# Altium PCB 263-15.2.PcbDoc
Units mm, origin at the board's own origin, x right, y up, seen from the top; angles counter-clockwise.
Board outline 53.09 x 25.43 mm, 2 copper layers (Top Layer, Bottom Layer); 15 components, 11 nets, 42 pads, 0 vias.
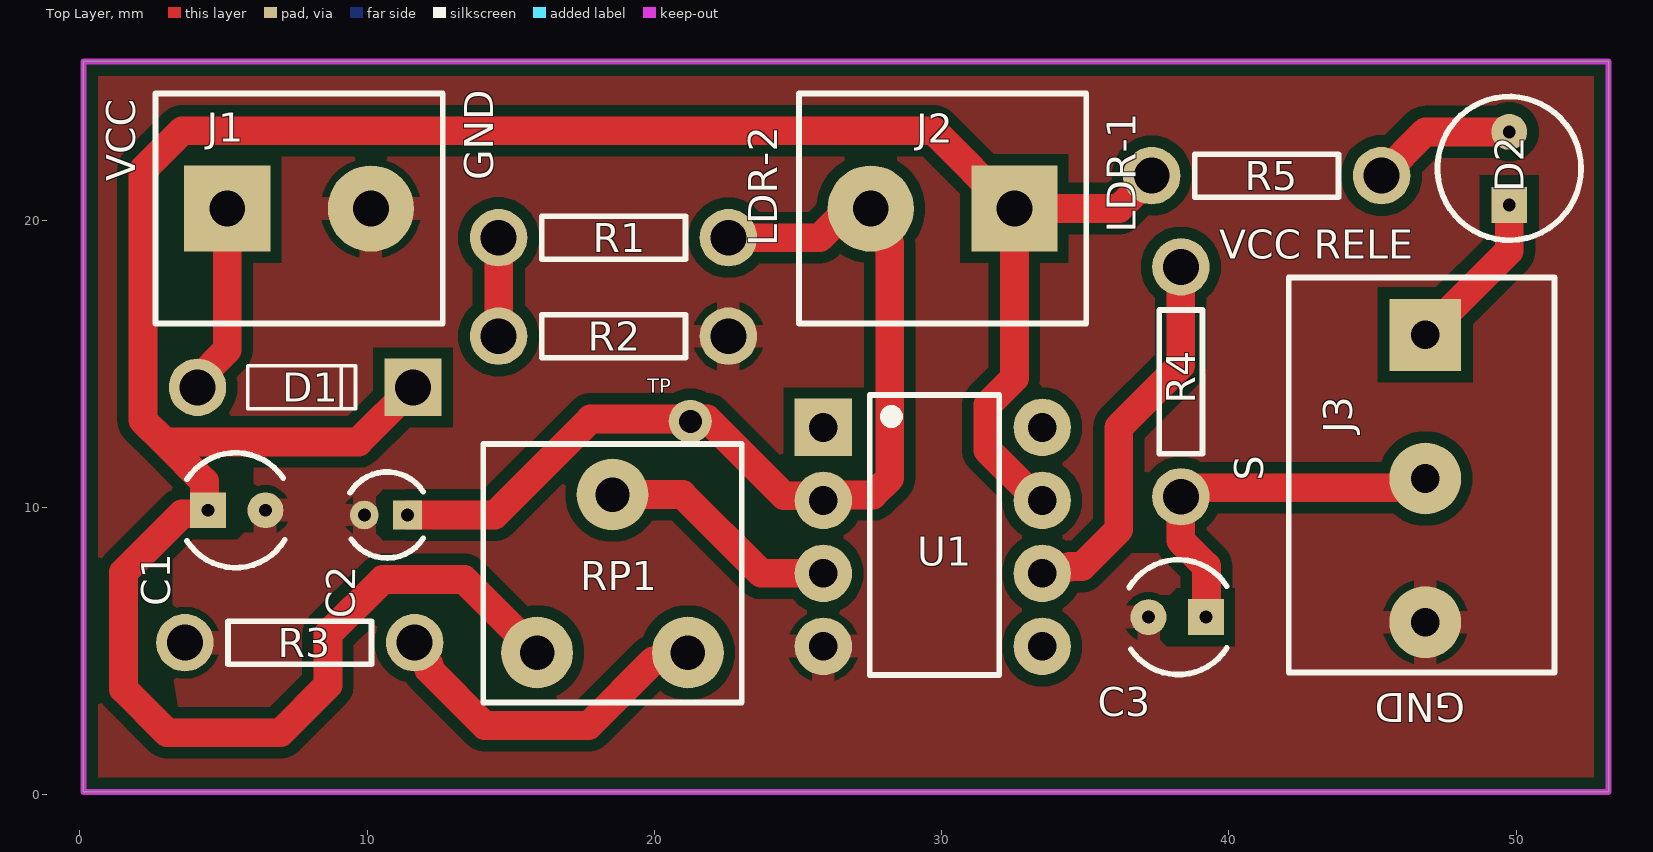
[diagram p0: Top Layer view]
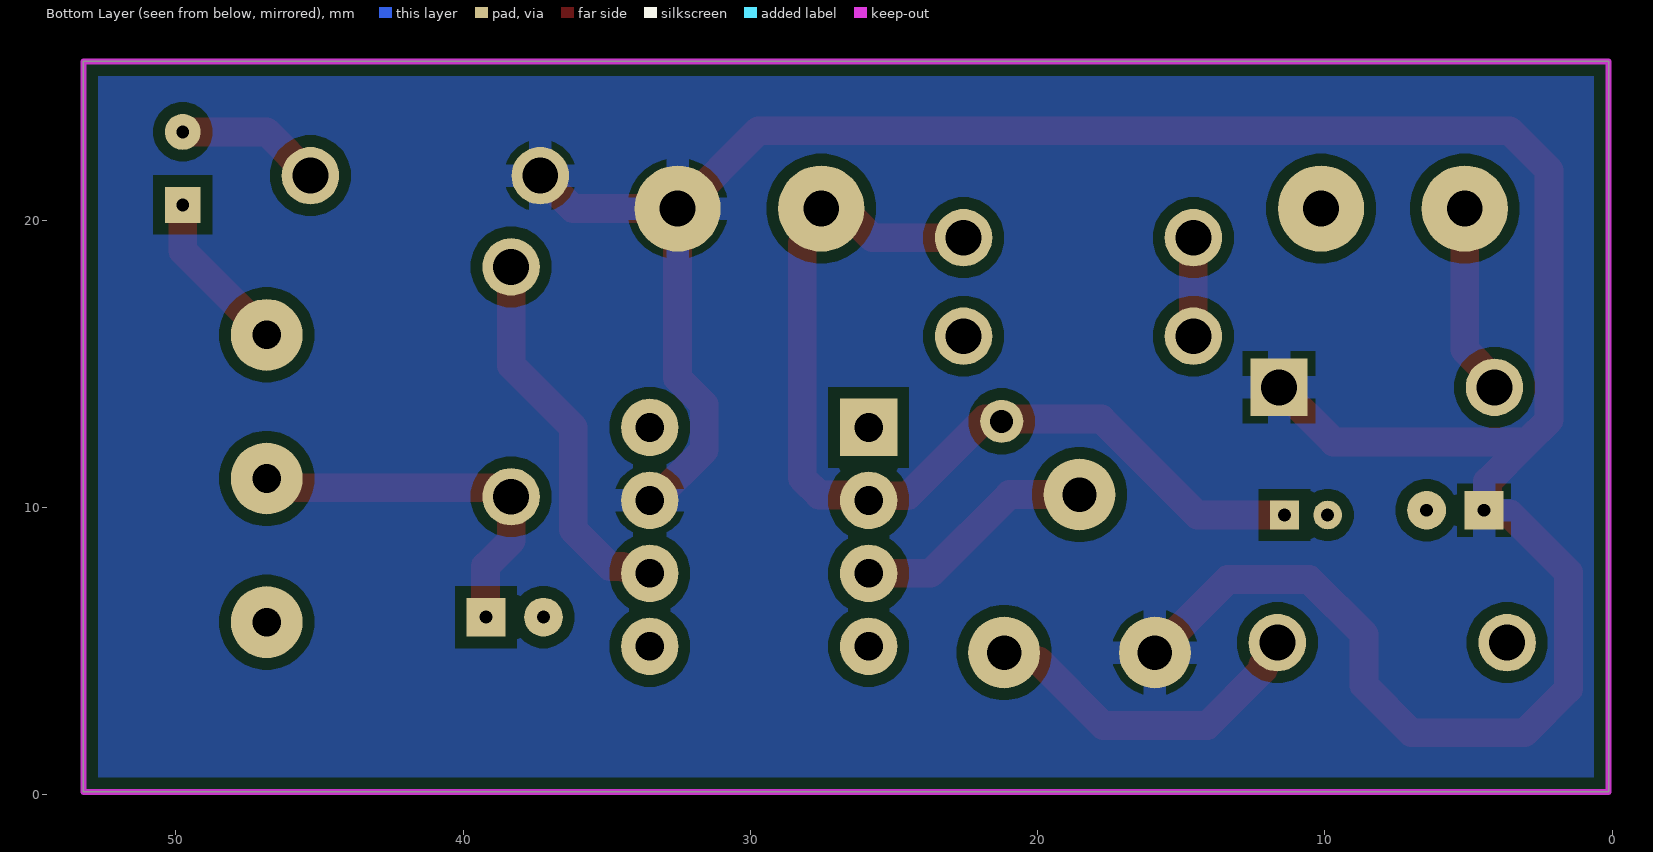
[diagram p1: Bottom Layer view, seen from below]

## Layer stack, top to bottom
Top Solder: solder mask 0.0102, Solder Resist, Dk 3.5
Top Layer: signal copper 0.0356
Dielectric 1: dielectric 0.32, FR-4, Dk 4.8
Bottom Layer: signal copper 0.0356
Bottom Solder: solder mask 0.0102, Solder Resist, Dk 3.5

## Board outline
0.127,0.1 0.127,25.527 53.213,25.527 53.213,0.1

## Design rules (kind name [scope] priority, off if disabled: settings)
AssemblyTestpoint [All] p1: testpointundercomponent=TRUE minsize=1.016 maxsize=2.54 preferedsize=1.524 minholesize=0 maxholesize=1 preferedholesize=0.8 testpointgrid=0.025 usegrid=FALSE gridtolerance=0 allowsidetop=TRUE allowsidebottom=TRUE
Clearance [All] p1: gap=0.4 ignorepadtopadclearanceinfootprint=FALSE
FabricationTestpoint [All] p1: side=3 testpointundercomponent=TRUE minsize=1.016 maxsize=2.54 preferedsize=1.5 minholesize=0 maxholesize=1 preferedholesize=0.8 testpointgrid=0.025 allowsidetop=TRUE allowsidebottom=TRUE usegrid=FALSE gridtolerance=0
PlaneConnect [All] p1: planeconnectstyle=Relief reliefexpansion=0.508 reliefentries=4 reliefconductorwidth=1 reliefairgap=0.254
PolygonConnect [All] p1: connectstyle=Relief reliefconductorwidth=0.8 reliefentries=4 polygonreliefangle="90 Angle" airgapwidth=0.254
RoutingVias [All] p1: holewidth=0.711 width=1.27 viastyle="Through Hole" minholewidth=0.711 minwidth=1.27 maxholewidth=0.711 maxwidth=1.27
SolderMaskExpansion [All] p1: expansion=0.102 istentingtop=FALSE
Width [All] p1: maxlimit=2 minlimit=0.254 preferedwidth=1 toplayer_minwidth=1 minimp=50.000000 maximp=50.000000 favimp=50.000000
27 further rules are at their usual default settings.

## Classes and differential pairs
component class 263-15.2: C2 C3 D1 D2 J1 J2 J3 R1 R2 R3 R4 R5 RP1 U1

## Components (designator, comment, footprint, x,y, rotation, side; value= is the part's Value field where it differs from the comment)
C1 "CAP_100uF_16V" CAP_2mm 5.461,9.906 r0 top value="100 uF"
C2 "CAP_10uF_16V" CAP_1.5mm 10.653,9.74 r180 top value="10 uF"
C3 "CAP_100uF_16V" CAP_2mm 38.2,6.184 r180 top value="100 uF"
D1 "D_1N4007" DO-41 7.847,14.185 r180 top
D2 "DL_MV5754A" LED-2.54mm 49.757,21.805 r90 top
J1 "CON_F_2_MB612-50002" CON_2_5mm 5.133,20.408 r0 top
J2 "CON_F_2_MB612-50002" CON_2_5mm 32.532,20.408 r180 top
J3 "CON_F_3_897-0812" CON_3_5MM 46.836,16.01 r270 top
R1 "R_100K_THC_0.25W" RESISTOR-8mm 14.579,19.392 r0 top value="100k Ω"
R2 "R_47K_THC_0.25W" RESISTOR-8mm 22.579,15.963 r180 top value="47k Ω"
R3 "R_100K_THC_0.25W" RESISTOR-8mm 3.657,5.295 r0 top value="100k Ω"
R4 "R_47K_THC_0.25W" RESISTOR-8mm 38.327,10.375 r90 top value="47k Ω"
R5 "R_330_THC_0.25W" RESISTOR-8mm 45.312,21.551 r180 top value="330 Ω"
RP1 "RP_RKT6V-H" RP_RKT6V 18.542,4.953 r0 top value="500K Ω"
U1 "IC_LM741" PDIP-8_THC 29.691,8.978 r0 top

## Footprints (in the part's own frame and the unit in brackets; to place one, negate y for a bottom-side part, rotate by r counter-clockwise, add the part's x,y. Pads: shape width x height; smd on the part's side, far side on the other; paste and mask are expansions set on the pad)
CAP_1.5mm [mm]
  rect 1x1 hole 0.45: 1(-0.75,0)
  round 1 hole 0.45: 2(0.75,0)
  silkscreen extent -1.3,-1.5 1.25,1.5
CAP_2mm [mm]
  rect 1.25x1.25 / inner rect 1.35x1.35 / far side rect 1.35x1.35 hole 0.45: 1(-1,0)
  round 1.25 / inner round 1.35 / far side round 1.35 hole 0.45: 2(1,0)
  silkscreen extent -1.73,-2 1.67,2
CON_2_5mm [mm]
  round 3 hole 1.25: 1(0,0) 2(5,0)
  rect 3x3 smd: 1(0,0)
  silkscreen extent -2.5,-4 7.5,4, body extent -2.5,-4.1 7.5,4, height 10.4
CON_3_5MM [mm]
  round 2.5 hole 1: 1(0,0) 2(5,0) 3(10,0)
  rect 2.5x2.5 smd: 1(0,0)
  silkscreen extent -2,-4.75 11.75,4.5, body extent -2.62,-5.25 12.38,5.05, height 14
DO-41 [mm]
  round 2 hole 1.25: A(3.75,0)
  rect 2x2 hole 1.25: K(-3.75,0)
  silkscreen extent -1.75,-0.75 2,0.75, body extent -4.24,-1 4.24,1, height 2
LED-2.54mm [mm]
  round 1.25 hole 0.45: A(1.27,0)
  rect 1.25x1.25 hole 0.45: K(-1.27,0)
  silkscreen extent -2.5,-2.5 2.5,2.5
PDIP-8_THC [mm]
  rect 2x2 hole 1: 1(-3.81,3.81)
  round 2 hole 1: 2(-3.81,1.27) 3(-3.81,-1.27) 4(-3.81,-3.81) 5(3.81,-3.81) 6(3.81,-1.27) 7(3.81,1.27) 8(3.81,3.81)
  silkscreen extent -2.19,-4.81 2.31,4.94, body extent -5.59,-4.79 5.33,4.79, height 5.08
RESISTOR-8mm [mm]
  round 2 hole 1.25: 1(0,0) 2(8,0)
  silkscreen extent 1.5,-0.75 6.5,0.75
RP_RKT6V [mm]
  round 2.5 hole 1.2: 1(-2.625,0) 2(0,5.5) 3(2.625,0)
  silkscreen extent -4.5,-1.74 4.5,7.26

## Part data
C1 C2 C3: "Capacitor", PackageDescription="Capacitor; 2 Leads", PackageReference=CAPR5-4X5, Published=23-Sep-2002, Publisher="Altium Limited"
D1: "Diode Standard 1000 V 1A Through Hole DO-41"
D2: "Diode Led Red", Max Nominal Current="20 mA", Max Power dissipated="80 mW", Max Temperature="100 ºC", Max Voltage Reverse="5 V", Min Temperature="-40 ºC", MPN=MV5754A, Voltage Forward="2 V", SMD/THC=THC
J1 J2: MPN=MB612-50002
J3: MPN=897-0812
R1 R2 R3 R4 R5: Temperature Max=°C, Temperature Min=°C
RP1: MPN=RKT6V-H, Temperature Max=°C, Temperature Min=°C
U1: Max Temperature="150 ºC", Min Temperature="-65 ºC", MPN=LM741N

## Free pads (board coordinates)
  round 1.5 hole 0.8: 4(21.25,13)

## Nets (pads, with @x,y where several pads share a name; then routed paths per layer and width w, separated by ;. In a path a pad name is that pad's centre, name@x,y a point inside that pad or via, vN(x,y) a via of type N, cw(c..) or ccw(c..) an arc to the next point about the centre after c; other vN are vias at no path point)
GND: C1.2 C2.2 C3.2 J1.2 J3.3 R2.1 R3.1 U1.4
Inverting: C2.1 J2.2 pad.4 R1.2 U1.2 | length 34.7
  Top Layer w1: C2.1 14.439,9.74 17.78,13.081 21.844,13.081 24.511,10.414 25.715,10.414 U1.2 26.072,10.439 27.608,10.439 28.194,11.025 28.194,19.205 27.532,19.867 J2.2 26.77,20.408 25.754,19.392 R1.2
NetD1_A: D1.A J1.1 | length 6.7
  Top Layer w1: D1.A 4.097,14.456 5.133,15.492 J1.1@5.133,20.408
NetD2_A: D2.A R5.1 | length 5.1
  Top Layer w1: R5.1 46.836,23.075 D2.A
NetD2_K: D2.K J3.1 | length 5.7
  Top Layer w1: J3.1@46.836,16.01 49.757,18.931 D2.K
NetR1_1: R1.1 R2.2 | length 3.4
  Top Layer w1: R2.2 R1.1
NetR3_2: R3.2 RP1.3 | length 11.5
  Top Layer w1: R3.2 11.657,5.024 12.157,4.524 12.157,4.353 14.097,2.413 17.713,2.413 19.966,4.666 20.474,4.666 RP1.3@20.679,4.871
"No inverting": RP1.2 U1.3 | length 8.5
  Top Layer w1: RP1.2 20.977,10.453 23.722,7.708 U1.3
Output: R4.2 U1.6 | length 13.3
  Top Layer w1: U1.6 33.692,7.899 34.399,7.899 34.446,7.946 34.882,7.946 36.168,9.232 36.168,12.788 38.327,14.947 R4.2
"Signal Rele": C3.1 J3.2 R4.1 | length 13.3
  Top Layer w1: C3.1 39.216,6.2 39.216,7.962 38.327,8.851 R4.1 38.644,10.693 46.518,10.693 J3.2
VCC: C1.1 D1.K J2.1 R5.2 RP1.1 U1.7 | length 98.1
  Top Layer w1: D1.K 9.697,12.285 2.955,12.285 ; RP1.1 13.377,7.493 10.541,7.493 8.636,5.588 8.636,3.81 6.985,2.159 3.048,2.159 1.524,3.683 1.524,7.747 3.558,9.781 4.336,9.781 C1.1 4.336,10.031 4.336,10.904 2.955,12.285 ; U1.7 33.354,10.248 31.601,12.001 31.601,13.575 32.532,14.506 J2.1@32.532,20.408 ; R5.2 36.169,20.408 J2.1@32.532,20.408 ; 2.955,12.285 2.197,13.043 2.197,21.745 3.566,23.114 29.718,23.114 32.424,20.408 J2.1@32.532,20.408
pads on no net: U1.1 U1.5 U1.8

## Polygon pours and split planes (outlines as drawn)
GND on Top Layer "GND_L01_P-001" (solid, remove dead copper, pour order 1): 0.127,25.4 0.254,25.527 53.213,25.527 53.213,0 0.127,0
VCC on Bottom Layer "VCC_L01_P002" (solid, remove dead copper, pour order 2): 0.127,25.4 0.254,25.527 53.213,25.527 53.213,0 0.127,0

## Keep-outs
Keep-Out Layer:
  lines w0.2: 0.127,0.1 0.127,25.527 53.213,25.527 53.213,0.1 39.824,0.1 14.678,0.1 0.127,0.1

## Other copper
Top Layer:
  pour cut-out: 6.061,10.69 6.061,11.379 6.049,11.391 5.461,11.391 5.461,10.189 5.57,10.08
  pour cut-out: 38.175,5.159 37.841,5.159 37.6,5.4 38.019,5.845 38.048,5.953 38.158,5.953 38.175,5.936
  pour cut-out: 37.6,6.968 37.934,6.968 38.175,7.209 38.175,6.432 38.048,6.415 37.6,6.863
  pour cut-out: 37.541,8.397 37.538,8.4 36.62,8.4 37.045,8.997 37.076,9.497 37.198,9.53 37.198,9.524 37.419,9.303
  pour cut-out: 3.257,6.486 3.173,6.464 2.559,5.901 2.432,5.935 2.432,7.371 3.24,8.179 3.24,6.503
  pour cut-out: 3.257,4.104 3.424,3.067 2.432,4.059 2.432,4.655 2.559,4.689 3.173,4.126
  pour cut-out: 10.303,9.1 10.503,8.9 10.503,9.108 10.454,9.156 10.359,9.156
  pour cut-out: 10.303,10.38 10.503,10.58 10.503,10.372 10.454,10.324 10.359,10.324
  pour cut-out: 6.061,9.122 5.727,9.122 5.486,8.881 5.486,9.658 5.615,9.677
  pour cut-out: 5.461,11.391 5.486,11.391 5.486,10.931 5.461,10.931

## Silkscreen, mask and mechanical layers (free items; w line width, h text height)
Top Overlay:
  text "GND" at 14.39,21.39 h1 r90
  text "VCC" at 1.93,21.36 h1 r90
  text "LDR-1" at 36.75,19.57 h1 r90
  text "LDR-2" at 24.27,19.1 h1 r90
  text "VCC RELE" at 39.67,18.66 h1
  text "TP" at 19.754,14.004 h0.5
  text "S" at 41.19,10.93 h1 r90
  text "GND" at 48.23,3.54 h1 r180